# EAGLE board CT_schematic (EAGLE 7.6.0)

Size 100 x 80 mm. Coordinates in mm from the lower left corner, seen from the top.
Outline: 0,0 100,0 100,80 0,80 0,0
Copper layers (1*16): Top 0.035mm / dielectric 1.5mm / Bottom 0.035mm
Design rules "default": minimum track width 10mil, minimum drill 24mil, track to track 8mil, track to pad 8mil, pad to pad 8mil, via to via 8mil, smd to smd 8mil, copper to edge 40mil, drill to drill 8mil, minimum pad ring 10mil, minimum via ring 8mil, stop-mask expansion 4mil, vias tented up to drill 0mil, thermal gap 10mil

## Footprints (pad centres in the part's own frame; a part is rotated, then mirrored left to right if it is on the bottom)
C0603 = smd 0.8 x 0.8: 1 -0.762,0; 2 0.762,0
C0402 = smd 0.5 x 0.5: 1 -0.508,0; 2 0.508,0
C0805 = smd 1.2 x 1.3: 1 -1.016,0; 2 1.016,0
C1206 = smd 1.3 x 1.6: 1 -1.524,0; 2 1.524,0
C1210 = smd 1.2 x 2.5: 1 -1.524,0; 2 1.524,0
R0603 = smd 0.8 x 0.8: 1 -0.762,0; 2 0.762,0
EXV-9H = smd 3.505 x 1.676: 1 -2.857,0; 2 2.857,0
L0603 = smd 0.8 x 0.8: 1 -0.762,0; 2 0.762,0
WE-HCI_7030/7040/7050 = smd 2.5 x 3: 1 -2.45,0; 2 2.45,0
PJ-037B_PACKAGE = drill 3.7 square: 1 12,0 | drill 3.2 square: 2 6,0
LQFP176 = smd 0.3 x 1.2: 1 -10.75,-12.75; 2 -10.25,-12.75; 3 -9.75,-12.75; 4 -9.25,-12.75; 5 -8.75,-12.75; 6 -8.25,-12.75; 7 -7.75,-12.75; 8 -7.25,-12.75; 9 -6.75,-12.75; 10 -6.25,-12.75; 11 -5.75,-12.75; 12 -5.25,-12.75; 13 -4.75,-12.75; 14 -4.25,-12.75; 15 -3.75,-12.75; 16 -3.25,-12.75; 17 -2.75,-12.75; 18 -2.25,-12.75; 19 -1.75,-12.75; 20 -1.25,-12.75; 21 -0.75,-12.75; 22 -0.25,-12.75; 23 0.25,-12.75; 24 0.75,-12.75; 25 1.25,-12.75; 26 1.75,-12.75; 27 2.25,-12.75; 28 2.75,-12.75; 29 3.25,-12.75; 30 3.75,-12.75; 31 4.25,-12.75; 32 4.75,-12.75; 33 5.25,-12.75; 34 5.75,-12.75; 35 6.25,-12.75; 36 6.75,-12.75; 37 7.25,-12.75; 38 7.75,-12.75; 39 8.25,-12.75; 40 8.75,-12.75; 41 9.25,-12.75; 42 9.75,-12.75; 43 10.25,-12.75; 44 10.75,-12.75; 89 10.75,12.75; 90 10.25,12.75; 91 9.75,12.75; 92 9.25,12.75; 93 8.75,12.75; 94 8.25,12.75; 95 7.75,12.75; 96 7.25,12.75; 97 6.75,12.75; 98 6.25,12.75; 99 5.75,12.75; 100 5.25,12.75; 101 4.75,12.75; 102 4.25,12.75; 103 3.75,12.75; 104 3.25,12.75; 105 2.75,12.75; 106 2.25,12.75; 107 1.75,12.75; 108 1.25,12.75; 109 0.75,12.75; 110 0.25,12.75; 111 -0.25,12.75; 112 -0.75,12.75; 113 -1.25,12.75; 114 -1.75,12.75; 115 -2.25,12.75; 116 -2.75,12.75; 117 -3.25,12.75; 118 -3.75,12.75; 119 -4.25,12.75; 120 -4.75,12.75; 121 -5.25,12.75; 122 -5.75,12.75; 123 -6.25,12.75; 124 -6.75,12.75; 125 -7.25,12.75; 126 -7.75,12.75; 127 -8.25,12.75; 128 -8.75,12.75; 129 -9.25,12.75; 130 -9.75,12.75; 131 -10.25,12.75; 132 -10.75,12.75 | smd 1.2 x 0.3: 45 12.75,-10.75; 46 12.75,-10.25; 47 12.75,-9.75; 48 12.75,-9.25; 49 12.75,-8.75; 50 12.75,-8.25; 51 12.75,-7.75; 52 12.75,-7.25; 53 12.75,-6.75; 54 12.75,-6.25; 55 12.75,-5.75; 56 12.75,-5.25; 57 12.75,-4.75; 58 12.75,-4.25; 59 12.75,-3.75; 60 12.75,-3.25; 61 12.75,-2.75; 62 12.75,-2.25; 63 12.75,-1.75; 64 12.75,-1.25; 65 12.75,-0.75; 66 12.75,-0.25; 67 12.75,0.25; 68 12.75,0.75; 69 12.75,1.25; 70 12.75,1.75; 71 12.75,2.25; 72 12.75,2.75; 73 12.75,3.25; 74 12.75,3.75; 75 12.75,4.25; 76 12.75,4.75; 77 12.75,5.25; 78 12.75,5.75; 79 12.75,6.25; 80 12.75,6.75; 81 12.75,7.25; 82 12.75,7.75; 83 12.75,8.25; 84 12.75,8.75; 85 12.75,9.25; 86 12.75,9.75; 87 12.75,10.25; 88 12.75,10.75; 133 -12.75,10.75; 134 -12.75,10.25; 135 -12.75,9.75; 136 -12.75,9.25; 137 -12.75,8.75; 138 -12.75,8.25; 139 -12.75,7.75; 140 -12.75,7.25; 141 -12.75,6.75; 142 -12.75,6.25; 143 -12.75,5.75; 144 -12.75,5.25; 145 -12.75,4.75; 146 -12.75,4.25; 147 -12.75,3.75; 148 -12.75,3.25; 149 -12.75,2.75; 150 -12.75,2.25; 151 -12.75,1.75; 152 -12.75,1.25; 153 -12.75,0.75; 154 -12.75,0.25; 155 -12.75,-0.25; 156 -12.75,-0.75; 157 -12.75,-1.25; 158 -12.75,-1.75; 159 -12.75,-2.25; 160 -12.75,-2.75; 161 -12.75,-3.25; 162 -12.75,-3.75; 163 -12.75,-4.25; 164 -12.75,-4.75; 165 -12.75,-5.25; 166 -12.75,-5.75; 167 -12.75,-6.25; 168 -12.75,-6.75; 169 -12.75,-7.25; 170 -12.75,-7.75; 171 -12.75,-8.25; 172 -12.75,-8.75; 173 -12.75,-9.25; 174 -12.75,-9.75; 175 -12.75,-10.25; 176 -12.75,-10.75
SAMTEC_FTSH-105-01-L-DV-K = smd 0.762 x 2.794: 1 -2.54,-2.032; 2 -2.54,2.032; 3 -1.27,-2.032; 4 -1.27,2.032; 5 0,-2.032; 6 0,2.032; 7 1.27,-2.032; 8 1.27,2.032; 9 2.54,-2.032; 10 2.54,2.032
QFN-32 = smd 0.6 x 0.3: 1 -2.3,1.75; 2 -2.3,1.25; 3 -2.3,0.75; 4 -2.3,0.25; 5 -2.3,-0.25; 6 -2.3,-0.75; 7 -2.3,-1.25; 8 -2.3,-1.75; 17 2.3,-1.75; 18 2.3,-1.25; 19 2.3,-0.75; 20 2.3,-0.25; 21 2.3,0.25; 22 2.3,0.75; 23 2.3,1.25; 24 2.3,1.75 | smd 0.3 x 0.6: 9 -1.75,-2.3; 10 -1.25,-2.3; 11 -0.75,-2.3; 12 -0.25,-2.3; 13 0.25,-2.3; 14 0.75,-2.3; 15 1.25,-2.3; 16 1.75,-2.3; 25 1.75,2.3; 26 1.25,2.3; 27 0.75,2.3; 28 0.25,2.3; 29 -0.25,2.3; 30 -0.75,2.3; 31 -1.25,2.3; 32 -1.75,2.3 | smd 3.2 x 3.2: EXP 0,0
7498011122R = smd 0.71 x 2.29: 1 -3.545,-3.18; 2 -2.525,-3.18; 3 -1.505,-3.18; 4 -0.485,-3.18; 5 0.535,-3.18; 6 1.555,-3.18; 8 3.595,-3.18; 9 5.635,-3.18; 10 6.655,-3.18; 11 -6.605,-3.18; 12 -5.585,-3.18 | smd 1.4 x 2.54: 13 -8.51,10.2; 14 8.51,10.2 | hole 1.4: -3.5,0; 3.5,0
SOT-23-8 = smd 0.4 x 1.2: 1 -0.975,-1.3; 2 -0.325,-1.3; 3 0.325,-1.3; 4 0.975,-1.3; 5 0.975,1.3; 6 0.325,1.3; 7 -0.325,1.3; 8 -0.975,1.3
182-009-MALE = drill 1.194 pad 1.524 octagon: 1 -5.537,10.923; 2 -2.769,10.923; 3 0,10.923; 4 2.769,10.923; 5 5.537,10.923; 6 -4.153,8.08; 7 -1.384,8.08; 8 1.384,8.08; 9 4.153,8.08 | hole 3.048: -12.446,9.501; 12.446,9.501
MOLEX_47219-2001 = smd 0.8 x 1.5: 1 3.2,-2.1; 2 2.1,-2.1; 3 1,-2.1; 4 -0.1,-2.1; 5 -1.2,-2.1; 6 -2.3,-2.1; 7 -3.4,-2.1; 8 -4.5,-2.1 | smd 1.5 x 2.05: G1 6.875,-4.7; G2 6.875,3.6; G3 -6.875,3.6; G4 -6.875,-4.7
SOIC-8 = smd 1.6 x 0.6: 1 -2.7,1.905 | smd 1.55 x 0.6: 2 -2.7,0.635; 3 -2.7,-0.635; 4 -2.7,-1.905; 5 2.7,-1.905; 6 2.7,-0.635; 7 2.7,0.635; 8 2.7,1.905
ASEK = smd 1.4 x 1: 1 -1.1,-0.8; 2 1.1,-0.8; 3 1.1,0.8; 4 -1.1,0.8
ASFL1 = smd 1.7 x 1.5: 1 -1.27,-1.1; 2 1.27,-1.1; 3 1.27,1.1; 4 -1.27,1.1
WSON-8 = smd 0.3 x 0.6: 1 -0.75,0; 2 0.05,0; 3 0.85,0; 4 1.65,0; 5 1.65,3.8; 6 0.85,3.8; 7 0.05,3.8; 8 -0.75,3.8 | smd 3 x 2.6: PAD 0.45,1.9
HTSSOP14 = smd 1.676 x 0.356: 1 -2.8,1.95; 2 -2.8,1.3; 3 -2.8,0.65; 4 -2.8,0; 5 -2.8,-0.65; 6 -2.8,-1.3; 7 -2.8,-1.95; 8 2.8,-1.95; 9 2.8,-1.3; 10 2.8,-0.65; 11 2.8,0; 12 2.8,0.65; 13 2.8,1.3; 14 2.8,1.95 | smd 3 x 5: 15 0,0 | drill 0.4 pad 0.45: P$1 -0.75,1.5; P$2 0.75,1.5; P$3 -0.75,0; P$4 0.8,0; P$5 -0.75,-1.5; P$6 0.9,-1.5
QFN-38_UHF = smd 0.75 x 0.3: 1 -2.4,2.75; 2 -2.4,2.25; 3 -2.4,1.75; 4 -2.4,1.25; 6 -2.4,0.25; 7 -2.4,-0.25; 8 -2.4,-0.75; 9 -2.4,-1.25; 10 -2.4,-1.75; 11 -2.4,-2.25; 12 -2.4,-2.75; 20 2.4,-2.75; 21 2.4,-2.25; 22 2.4,-1.75; 23 2.4,-1.25; 24 2.4,-0.75; 25 2.4,-0.25; 26 2.4,0.25; 27 2.4,0.75; 28 2.4,1.25; 29 2.4,1.75; 30 2.4,2.25; 31 2.4,2.75 | smd 0.758 x 0.3: 5 -2.4,0.75 | smd 0.3 x 0.75: 13 -1.5,-3.4; 14 -1,-3.4; 15 -0.5,-3.4; 16 0,-3.4; 17 0.5,-3.4; 18 1,-3.4; 19 1.5,-3.4; 32 1.5,3.4; 33 1,3.4; 34 0.5,3.4; 35 0,3.4; 36 -0.5,3.4; 37 -1,3.4; 38 -1.5,3.4 | smd 3.2 x 5.2: 39 0,0
IRF8306MTRPBF = smd 0.9 x 1.85: 1 0,0; 2 0,-2.35; 6 6.4,0; 7 6.4,-2.35 | smd 0.75 x 0.75: 3 1.75,-1.175 | smd 1.45 x 0.87: 4 3.5,-0.565; 5 3.5,-1.785
SW_4-1437565-2 = smd 1.4 x 2.1: 1 -2.23,4.55; 2 -2.23,-4.55; 3 2.23,4.55; 4 2.23,-4.55
LGM67K-G1J2-24-Z = smd 0.8 x 1.4: A -2,0; C 0,0
NC7SZ125M5X = smd 1.3 x 0.7: 1 -1.3,0.95; 2 -1.3,0; 3 -1.3,-0.95; 4 1.3,-0.95; 5 1.3,0.95

## Placement (x,y rotation side)
C1  1e-06  [C0603]  -35.56,100.33 0 top  (outside the outline)
C2  1e-07  [C0603]  -39.37,100.33 0 top  (outside the outline)
C3  1e-07  [C0603]  -43.18,100.33 0 top  (outside the outline)
C4  1e-07  [C0603]  -46.99,100.33 0 top  (outside the outline)
C5  1e-07  [C0603]  -50.8,100.33 0 top  (outside the outline)
C6  1e-07  [C0603]  -54.61,100.33 0 top  (outside the outline)
C7  1e-07  [C0603]  -58.42,100.33 0 top  (outside the outline)
C8  1e-07  [C0603]  -62.23,100.33 0 top  (outside the outline)
C9  1e-07  [C0603]  -66.04,100.33 0 top  (outside the outline)
C10  1e-07  [C0603]  -69.85,100.33 0 top  (outside the outline)
C11  1e-07  [C0603]  -73.66,100.33 0 top  (outside the outline)
C12  1e-07  [C0603]  -77.47,100.33 0 top  (outside the outline)
C13  1e-07  [C0603]  -81.28,100.33 0 top  (outside the outline)
C14  1e-07  [C0603]  -85.09,100.33 0 top  (outside the outline)
C15  1e-07  [C0603]  -88.9,100.33 0 top  (outside the outline)
C16  1e-07  [C0603]  -92.71,100.33 0 top  (outside the outline)
C17  1e-07  [C0603]  -96.52,100.33 0 top  (outside the outline)
C18  4.7e-06  [C0603]  -24.13,100.33 0 top  (outside the outline)
C19  1e-08  [C0603]  -100.33,100.33 0 top  (outside the outline)
C20  1e-06  [C0603]  -104.14,100.33 0 top  (outside the outline)
C21  1e-07  [C0402]  -31.75,110.49 0 top  (outside the outline)
C22  1e-07  [C0402]  -35.56,110.49 0 top  (outside the outline)
C23  1e-07  [C0402]  -39.37,110.49 0 top  (outside the outline)
C24  2.2e-08  [C0402]  -24.13,110.49 0 top  (outside the outline)
C25  1e-06  [C0603]  -15.24,105.41 0 top  (outside the outline)
C26  1e-06  [C0603]  -19.05,105.41 0 top  (outside the outline)
C27  4.7e-10  [C0603]  -27.94,100.33 0 top  (outside the outline)
C28  1e-06  [C0603]  -22.86,105.41 0 top  (outside the outline)
C29  1e-07  [C0402]  -43.18,110.49 0 top  (outside the outline)
C30  1e-07  [C0402]  -46.99,110.49 0 top  (outside the outline)
C31  1e-05  [C0805]  -58.42,83.82 0 top  (outside the outline)
C32  1e-07  [C0402]  -50.8,110.49 0 top  (outside the outline)
C33  1e-08  [C0402]  -54.61,110.49 0 top  (outside the outline)
C34  1e-08  [C0402]  -58.42,110.49 0 top  (outside the outline)
C35  1e-08  [C0402]  -62.23,110.49 0 top  (outside the outline)
C36  1e-08  [C0402]  -66.04,110.49 0 top  (outside the outline)
C37  1e-05  [C1206]  -101.6,76.2 0 top  (outside the outline)
C38  1e-05  [C0805]  -63.5,83.82 0 top  (outside the outline)
C39  1e-06  [C0603]  -26.67,105.41 0 top  (outside the outline)
C40  3.3e-09  [C0402]  -27.94,110.49 0 top  (outside the outline)
C41  1e-07  [C0402]  -69.85,110.49 0 top  (outside the outline)
C42  2.2e-05  [C1210]  -88.9,77.47 0 top  (outside the outline)
C43  2.2e-05  [C1210]  -95.25,77.47 0 top  (outside the outline)
C44  1e-05  [C1206]  -16.51,85.09 0 top  (outside the outline)
C45  1e-05  [C1206]  -22.86,85.09 0 top  (outside the outline)
C46  1e-08  [C0402]  -73.66,110.49 0 top  (outside the outline)
C47  1e-05  [C1206]  -29.21,85.09 0 top  (outside the outline)
C48  1e-05  [C0805]  -68.58,83.82 0 top  (outside the outline)
C49  1e-07  [C0402]  -77.47,110.49 0 top  (outside the outline)
C50  2.2e-06  [C0603]  -31.75,100.33 0 top  (outside the outline)
C51  2.45e-08  [R0603]  -55.88,90.17 0 top  (outside the outline)
C52  2.8258362168397e-09  [R0603]  -78.74,83.82 0 top  (outside the outline)
C53  7.105e-09  [R0603]  -91.44,83.82 0 top  (outside the outline)
C54  0.0001  [EXV-9H]  -46.99,77.47 0 top  (outside the outline)
C55  0.0001  [EXV-9H]  -58.42,77.47 0 top  (outside the outline)
C56  1e-08  [C0402]  -81.28,110.49 0 top  (outside the outline)
C57  1e-08  [C0402]  -85.09,110.49 0 top  (outside the outline)
C58  1e-08  [C0402]  -88.9,110.49 0 top  (outside the outline)
F1  240.0  [L0603]  -30.48,105.41 0 top  (outside the outline)
I1  97.0  [R0603]  -34.29,105.41 0 top  (outside the outline)
I5  3.3e-06  [WE-HCI_7030/7040/7050]  -33.02,55.88 0 top  (outside the outline)
J1  PJ-037B  [PJ-037B_PACKAGE]  -27.94,57.15 0 top  (outside the outline)
R2  1000.0  [R0603]  -38.1,105.41 0 top  (outside the outline)
R7  4700.0  [R0603]  -41.91,105.41 0 top  (outside the outline)
R8  4700.0  [R0603]  -45.72,105.41 0 top  (outside the outline)
R9  2200.0  [R0603]  -49.53,105.41 0 top  (outside the outline)
R11  2200.0  [R0603]  -53.34,105.41 0 top  (outside the outline)
R13  10000.0  [R0603]  -60.96,90.17 0 top  (outside the outline)
R14  10000.0  [R0603]  -66.04,90.17 0 top  (outside the outline)
R15  10000.0  [R0603]  -71.12,90.17 0 top  (outside the outline)
R16  10000.0  [R0603]  -76.2,90.17 0 top  (outside the outline)
R17  10000.0  [R0603]  -81.28,90.17 0 top  (outside the outline)
R18  10000.0  [R0603]  -86.36,90.17 0 top  (outside the outline)
R19  10000.0  [R0603]  -91.44,90.17 0 top  (outside the outline)
R20  5.0  [R0603]  -57.15,105.41 0 top  (outside the outline)
R21  0.1  [R0603]  -60.96,105.41 0 top  (outside the outline)
R22  0.1  [R0603]  -64.77,105.41 0 top  (outside the outline)
R23  200.0  [R0603]  -68.58,105.41 0 top  (outside the outline)
R24  200.0  [R0603]  -72.39,105.41 0 top  (outside the outline)
R25  12100.0  [R0603]  -96.52,90.17 0 top  (outside the outline)
R26  49.9  [R0603]  -76.2,105.41 0 top  (outside the outline)
R27  49.9  [R0603]  -80.01,105.41 0 top  (outside the outline)
R28  49.9  [R0603]  -83.82,105.41 0 top  (outside the outline)
R29  10000.0  [R0603]  -101.6,90.17 0 top  (outside the outline)
R30  49.9  [R0603]  -87.63,105.41 0 top  (outside the outline)
R31  10000.0  [R0603]  -15.24,95.25 0 top  (outside the outline)
R32  10000.0  [R0603]  -20.32,95.25 0 top  (outside the outline)
R33  10000.0  [R0603]  -25.4,95.25 0 top  (outside the outline)
R34  10000.0  [R0603]  -30.48,95.25 0 top  (outside the outline)
R35  10000.0  [R0603]  -35.56,95.25 0 top  (outside the outline)
R36  10000.0  [R0603]  -40.64,95.25 0 top  (outside the outline)
R37  10000.0  [R0603]  -45.72,95.25 0 top  (outside the outline)
R38  10000.0  [R0603]  -50.8,95.25 0 top  (outside the outline)
R39  10000.0  [R0603]  -55.88,95.25 0 top  (outside the outline)
R40  120.0  [R0603]  -91.44,105.41 0 top  (outside the outline)
R41  100000.0  [R0603]  -96.52,83.82 0 top  (outside the outline)
R42  100000.0  [R0603]  -101.6,83.82 0 top  (outside the outline)
R43  100000.0  [R0603]  -15.24,90.17 0 top  (outside the outline)
R44  100000.0  [R0603]  -20.32,90.17 0 top  (outside the outline)
R45  100000.0  [R0603]  -25.4,90.17 0 top  (outside the outline)
R46  100000.0  [R0603]  -30.48,90.17 0 top  (outside the outline)
R47  100000.0  [R0603]  -35.56,90.17 0 top  (outside the outline)
R48  120.0  [R0603]  -95.25,105.41 0 top  (outside the outline)
R49  470000.0  [R0603]  -40.64,90.17 0 top  (outside the outline)
R50  100000.0  [R0603]  -45.72,90.17 0 top  (outside the outline)
R51  200.0  [R0603]  -99.06,105.41 0 top  (outside the outline)
R52  1000.0  [R0603]  -102.87,105.41 0 top  (outside the outline)
R53  71007.101651032  [R0603]  -86.36,83.82 0 top  (outside the outline)
R54  22000.0  [R0603]  -60.96,95.25 0 top  (outside the outline)
R55  100000.0  [R0603]  -50.8,90.17 0 top  (outside the outline)
R56  200.0  [R0603]  -15.24,110.49 0 top  (outside the outline)
R57  1000.0  [R0603]  -19.05,110.49 0 top  (outside the outline)
R58  10000.0  [R0603]  -66.04,95.25 0 top  (outside the outline)
R59  75000.0  [R0603]  -71.12,95.25 0 top  (outside the outline)
R60  10000.0  [R0603]  -76.2,95.25 0 top  (outside the outline)
R61  10000.0  [R0603]  -81.28,95.25 0 top  (outside the outline)
R62  95300.0  [R0603]  -86.36,95.25 0 top  (outside the outline)
R63  95300.0  [R0603]  -91.44,95.25 0 top  (outside the outline)
R64  10000.0  [R0603]  -96.52,95.25 0 top  (outside the outline)
R65  10000.0  [R0603]  -101.6,95.25 0 top  (outside the outline)
R66  10000.0  [R0603]  -15.24,100.33 0 top  (outside the outline)
R67  62000.0  [R0603]  -20.32,100.33 0 top  (outside the outline)
U1  STM32F429IIT6  [LQFP176]  -45.72,13.97 0 top  (outside the outline)
U2  FTSH-105-01-L-DV-K  [SAMTEC_FTSH-105-01-L-DV-K]  -95.25,36.83 0 top  (outside the outline)
U3  LAN8710AI-EZK  [QFN-32]  -66.04,55.88 0 top  (outside the outline)
U4  7498011122R  [7498011122R]  -22.86,7.62 0 top  (outside the outline)
U5  MAX3051EKA+T  [SOT-23-8]  -34.29,83.82 0 top  (outside the outline)
U6  182-009-113R531  [182-009-MALE]  -82.55,6.35 0 top  (outside the outline)
U7  0472192001  [MOLEX_47219-2001]  -62.23,36.83 0 top  (outside the outline)
U8  SN65HVD230D  [SOIC-8]  -80.01,55.88 0 top  (outside the outline)
U9  182-009-113R531  [182-009-MALE]  -36.83,34.29 0 top  (outside the outline)
U10  ASEK-32.768KHz-ECST  [ASEK]  -38.1,77.47 0 top  (outside the outline)
U11  ASFL1-25MHZ-NCS  [ASFL1]  -82.55,68.58 0 top  (outside the outline)
U12  ASFL1-50MHZ-NCS  [ASFL1]  -99.06,68.58 0 top  (outside the outline)
U13  LP3878SDX-ADJ/NOPB  [WSON-8]  -45.72,67.31 0 top  (outside the outline)
U14  TPS54425PWP  [HTSSOP14]  -68.58,77.47 0 top  (outside the outline)
U15  LP3878SDX-ADJ/NOPB  [WSON-8]  -66.04,67.31 0 top  (outside the outline)
U16  LTC2928CUHF#PBF  [QFN-38_UHF]  -16.51,77.47 0 top  (outside the outline)
U17  IRF8306MTRPbF  [IRF8306MTRPBF]  -97.79,55.88 0 top  (outside the outline)
U18  IRF8306MTRPbF  [IRF8306MTRPBF]  -26.67,69.85 0 top  (outside the outline)
U19  4-1437565-2  [SW_4-1437565-2]  -52.07,55.88 0 top  (outside the outline)
U20  Q65110A2395  [LGM67K-G1J2-24-Z]  -77.47,77.47 0 top  (outside the outline)
U21  nc7sz125m5x  [NC7SZ125M5X]  -39.37,83.82 0 top  (outside the outline)
U22  nc7sz125m5x  [NC7SZ125M5X]  -45.72,83.82 0 top  (outside the outline)
U23  nc7sz125m5x  [NC7SZ125M5X]  -52.07,83.82 0 top  (outside the outline)

## Library data of the parts
C1-C58 F1 I1 I5 J1 R2 R7-R9 R11 R13-R67 U1-U23 = circuit_tree

## Nets
CLK_U1_9: U1.9 U10.3
CLK_U1_29: U1.29 U11.3
CLK_U1_41: U1.41 U12.3
GND: C1.2 C2.2 C3.2 C4.2 C5.2 C6.2 C7.2 C8.2 C9.2 C10.2 C11.2 C12.2 C13.2 C14.2 C15.2 C16.2 C17.2 C18.2 C19.2 C20.2 C21.2 C22.2 C23.2 C24.2 C25.2 C26.2 C27.2 C28.2 C29.2 C30.2 C31.2 C32.2 C33.2 C34.2 C35.2 C36.2 C37.2 C38.2 C39.2 C40.2 C42.2 C43.2 C44.2 C45.2 C46.2 C47.2 C48.2 C49.2 C50.2 C51.2 C52.2 C53.2 C54.2 C55.2 C56.2 C57.2 C58.2 J1.2 R2.2 R20.2 R21.2 R22.2 R23.2 R25.2 R31.2 R39.2 R41.2 R49.2 R52.2 R54.2 R57.2 R59.2 R62.2 R63.2 R64.2 R65.2 R66.2 U1.14 U1.22 U1.37 U1.61 U1.71 U1.90 U1.102 U1.113 U1.126 U1.135 U1.148 U1.158 U2.3 U2.5 U3.24 U3.25 U3.EXP U5.2 U6.5 U7.6 U7.G1 U7.G2 U7.G3 U7.G4 U8.2 U9.5 U10.2 U11.2 U12.2 U13.3 U13.PAD U14.5 U14.8 U14.9 U14.15 U15.3 U15.PAD U16.8 U16.9 U16.10 U16.12 U16.13 U16.24 U16.25 U16.30 U16.32 U16.39 U20.C U21.2 U21.3 U22.1 U22.3 U23.1 U23.3
NET_U1_31: R8.1 U1.31 U23.4
NET_U1_33: R9.1 U1.33 U3.17
NET_U1_39: C19.1 C20.1 F1.1 U1.38 U1.39
NET_U1_42: R11.1 U1.42 U3.16
NET_U1_48: R16.1 U1.48
NET_U1_58: R15.1 U1.58
NET_U1_125: C22.1 U1.125
NET_U1_166: R14.1 U1.166
NET_U1_171: R13.1 U1.171
NET_U1_175: U20.A
NET_U1_176: U19.3 U19.4
NET_U2_9: R20.1 U2.9
NET_U3_1: C25.1 I1.1 R26.2 R27.2 R28.2 R30.2 R33.2 U3.1 U3.27 U4.2 U4.9
NET_U3_3: R33.1 U3.3
NET_U3_7: R38.1 U3.7
NET_U3_8: R39.1 U3.8
NET_U3_9: R31.1 R32.1 U3.9
NET_U3_13: R37.1 U3.13
NET_U3_18: R29.1 U3.18
NET_U3_19: R7.1 U3.19 U22.4
NET_U3_32: R25.1 U3.32
NET_U4_1: R26.1 U3.29 U4.1
NET_U4_3: R24.2 R27.1 U3.28 U4.3
NET_U4_4: R28.1 U3.31 U4.4
NET_U4_5: C24.1 U4.2 U4.5
NET_U4_6: R30.1 U3.30 U4.6
NET_U4_8: R22.1 U4.8
NET_U4_10: R24.1 U4.10
NET_U4_11: U3.2 U4.11
NET_U4_12: R23.1 U4.12
NET_U4_13: R21.1 U4.13 U4.14
NET_U5_6: R40.2 U5.6
NET_U5_8: R41.1 U5.8
NET_U6_2: R40.2 U5.6 U6.2
NET_U6_3: R40.1 U5.7 U6.3
NET_U8_6: R48.2 U8.6
NET_U8_8: R49.1 U8.8
NET_U9_2: R48.2 U8.6 U9.2
NET_U9_3: R48.1 U8.7 U9.3
NET_U13_1: C36.1 U13.1
NET_U13_6: R51.2 R52.1 U13.6
NET_U13_8: R50.1 U13.8
NET_U14_2: R53.2 R54.1 U14.2
NET_U14_3: C39.1 U14.3
NET_U14_4: C40.1 U14.4
NET_U14_10: C41.1 I5.1 U14.10 U14.11
NET_U14_12: C41.2 U14.12
NET_U15_1: C46.1 U15.1
NET_U15_6: R56.2 R57.1 U15.6
NET_U15_8: R55.1 U15.8
NET_U16_3: R65.1 U16.3
NET_U16_6: R62.1 U16.6
NET_U16_7: R63.1 U16.7
NET_U16_16: R64.1 R67.1 U16.16
NET_U16_18: R61.1 U16.18
NET_U16_19: R60.1 U16.19 U16.20
NET_U16_21: R58.1 R59.1 U16.21 U21.4 U22.2 U23.2
NET_U16_22: C49.1 R58.2 R60.2 R61.2 U16.11 U16.22
NET_U16_26: C52.1 U16.26
NET_U16_27: C51.1 U16.27
NET_U16_28: C53.1 U16.28
NET_U16_38: R66.1 U16.38
NET_U17_3: U16.2 U17.3
NET_U18_3: U16.37 U18.3
NET_U19_1: R2.1 U19.1 U19.2
PROC_CAN1_RX: U1.11 U5.4
PROC_CAN1_TX: U1.123 U5.1
PROC_CAN2_RX: U1.92 U8.4
PROC_CAN2_TX: U1.93 U8.1
PROC_ETH_CRS_DV: R36.1 U1.53 U3.15
PROC_ETH_RXD0: R34.1 U1.54 U3.11
PROC_ETH_RXD1: R35.1 U1.55 U3.10
PROC_ETH_TX_EN: U1.80 U3.21
PROC_ETH_TXD0: U1.156 U3.22
PROC_ETH_TXD1: U1.157 U3.23
PROC_SDIO_CK: R43.1 U1.141 U7.5
PROC_SDIO_CMD: R42.1 U1.144 U7.3
PROC_SDIO_D0: R44.1 U1.117 U7.7
PROC_SDIO_D1: R45.1 U1.118 U7.8
PROC_SDIO_D2: R46.1 U1.139 U7.1
PROC_SDIO_D3: R47.1 U1.140 U7.2
PROC_SYS_JTCK_SWCLK: R18.1 U1.137 U2.4
PROC_SYS_JTDO_SWO: U1.161 U2.6
PROC_SYS_JTMS_SWDIO: R19.1 U1.124 U2.2
RST_OUT_U2_JTAG_RST_B: R17.1 U2.10 U21.1
VCC_7V9: C50.1 C54.1 C55.1 J1.1 R67.2 U16.23 U17.1 U17.2 U17.6 U17.7 U18.1 U18.2 U18.6 U18.7
VCC_S1_7V9: C37.1 C44.1 C45.1 R50.2 U13.4 U14.7 U14.13 U14.14 U17.4 U17.5
VCC_S2_7V9: C47.1 R55.2 U15.4 U18.4 U18.5
VCC_TIER1_1V2: C21.1 C26.1 C27.1 C38.1 R51.1 U1.81 U3.6 U13.5
VCC_TIER1_3V3: C1.1 C2.1 C3.1 C4.1 C5.1 C6.1 C7.1 C8.1 C9.1 C10.1 C11.1 C12.1 C13.1 C14.1 C15.1 C16.1 C17.1 C18.1 C23.1 C28.1 C29.1 C30.1 C31.1 C32.1 C33.1 C34.1 C35.1 C42.1 C43.1 C56.1 C57.1 C58.1 F1.2 I1.2 I5.2 R7.2 R8.2 R9.2 R11.2 R13.2 R14.2 R15.2 R16.2 R17.2 R18.2 R19.2 R29.2 R32.2 R34.2 R35.2 R36.2 R37.2 R38.2 R42.2 R43.2 R44.2 R45.2 R46.2 R47.2 R53.1 U1.6 U1.15 U1.23 U1.36 U1.49 U1.62 U1.72 U1.82 U1.91 U1.103 U1.114 U1.127 U1.136 U1.149 U1.159 U1.172 U2.1 U3.12 U5.3 U7.4 U8.3 U10.4 U11.4 U12.4 U14.1 U21.5 U22.5 U23.5
VCC_TIER2_1V2: C48.1 R56.1 U15.5

## Tracks (layer width: path | path; a pad name or v marks a point on that pad's centre or on a via)
CLK_U1_9  (1 unrouted)
CLK_U1_29  (1 unrouted)
CLK_U1_41  (1 unrouted)
GND  (130 unrouted)
NET_U1_31  (2 unrouted)
NET_U1_33  (2 unrouted)
NET_U1_39  (4 unrouted)
NET_U1_42  (2 unrouted)
NET_U1_48  (1 unrouted)
NET_U1_58  (1 unrouted)
NET_U1_125  (1 unrouted)
NET_U1_166  (1 unrouted)
NET_U1_171  (1 unrouted)
NET_U1_176  (1 unrouted)
NET_U2_9  (1 unrouted)
NET_U3_1  (10 unrouted)
NET_U3_3  (1 unrouted)
NET_U3_7  (1 unrouted)
NET_U3_8  (1 unrouted)
NET_U3_9  (2 unrouted)
NET_U3_13  (1 unrouted)
NET_U3_18  (1 unrouted)
NET_U3_19  (2 unrouted)
NET_U3_32  (1 unrouted)
NET_U4_1  (2 unrouted)
NET_U4_3  (3 unrouted)
NET_U4_4  (2 unrouted)
NET_U4_5  (2 unrouted)
NET_U4_6  (2 unrouted)
NET_U4_8  (1 unrouted)
NET_U4_10  (1 unrouted)
NET_U4_11  (1 unrouted)
NET_U4_12  (1 unrouted)
NET_U4_13  (2 unrouted)
NET_U5_6  (1 unrouted)
NET_U5_8  (1 unrouted)
NET_U6_2  (2 unrouted)
NET_U6_3  (2 unrouted)
NET_U8_6  (1 unrouted)
NET_U8_8  (1 unrouted)
NET_U9_2  (2 unrouted)
NET_U9_3  (2 unrouted)
NET_U13_1  (1 unrouted)
NET_U13_6  (2 unrouted)
NET_U13_8  (1 unrouted)
NET_U14_2  (2 unrouted)
NET_U14_3  (1 unrouted)
NET_U14_4  (1 unrouted)
NET_U14_10  (3 unrouted)
NET_U14_12  (1 unrouted)
NET_U15_1  (1 unrouted)
NET_U15_6  (2 unrouted)
NET_U15_8  (1 unrouted)
NET_U16_3  (1 unrouted)
NET_U16_6  (1 unrouted)
NET_U16_7  (1 unrouted)
NET_U16_16  (2 unrouted)
NET_U16_18  (1 unrouted)
NET_U16_19  (2 unrouted)
NET_U16_21  (5 unrouted)
NET_U16_22  (5 unrouted)
NET_U16_26  (1 unrouted)
NET_U16_27  (1 unrouted)
NET_U16_28  (1 unrouted)
NET_U16_38  (1 unrouted)
NET_U17_3  (1 unrouted)
NET_U18_3  (1 unrouted)
NET_U19_1  (2 unrouted)
PROC_CAN1_RX  (1 unrouted)
PROC_CAN1_TX  (1 unrouted)
PROC_CAN2_RX  (1 unrouted)
PROC_CAN2_TX  (1 unrouted)
PROC_ETH_CRS_DV  (2 unrouted)
PROC_ETH_RXD0  (2 unrouted)
PROC_ETH_RXD1  (2 unrouted)
PROC_ETH_TX_EN  (1 unrouted)
PROC_ETH_TXD0  (1 unrouted)
PROC_ETH_TXD1  (1 unrouted)
PROC_SDIO_CK  (2 unrouted)
PROC_SDIO_CMD  (2 unrouted)
PROC_SDIO_D0  (2 unrouted)
PROC_SDIO_D1  (2 unrouted)
PROC_SDIO_D2  (2 unrouted)
PROC_SDIO_D3  (2 unrouted)
PROC_SYS_JTCK_SWCLK  (2 unrouted)
PROC_SYS_JTDO_SWO  (1 unrouted)
PROC_SYS_JTMS_SWDIO  (2 unrouted)
RST_OUT_U2_JTAG_RST_B  (2 unrouted)
VCC_7V9  (13 unrouted)
VCC_S1_7V9  (9 unrouted)
VCC_S2_7V9  (4 unrouted)
VCC_TIER1_1V2  (7 unrouted)
VCC_TIER1_3V3  (87 unrouted)
VCC_TIER2_1V2  (2 unrouted)